# Altium PCB RPS_ARMOR_light_PCB_2022_V1.0.PcbDoc
Units mil, origin at the board's own origin, x right, y up, seen from the top; angles counter-clockwise.
Board outline 314.96 x 1771.65 mil, 3 copper layers (Top Layer, Mid-Layer 2, Bottom Layer); 13 components, 5 nets, 52 pads, 37 vias.
Unrouted connection lines stored in the file: 1.
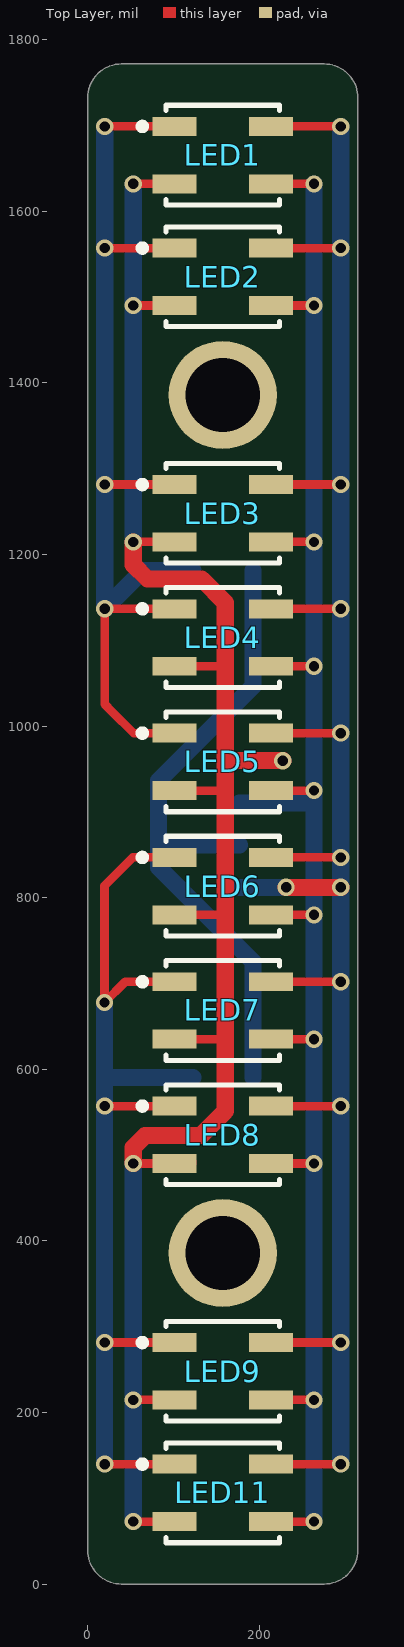
[diagram p0: Top Layer view]
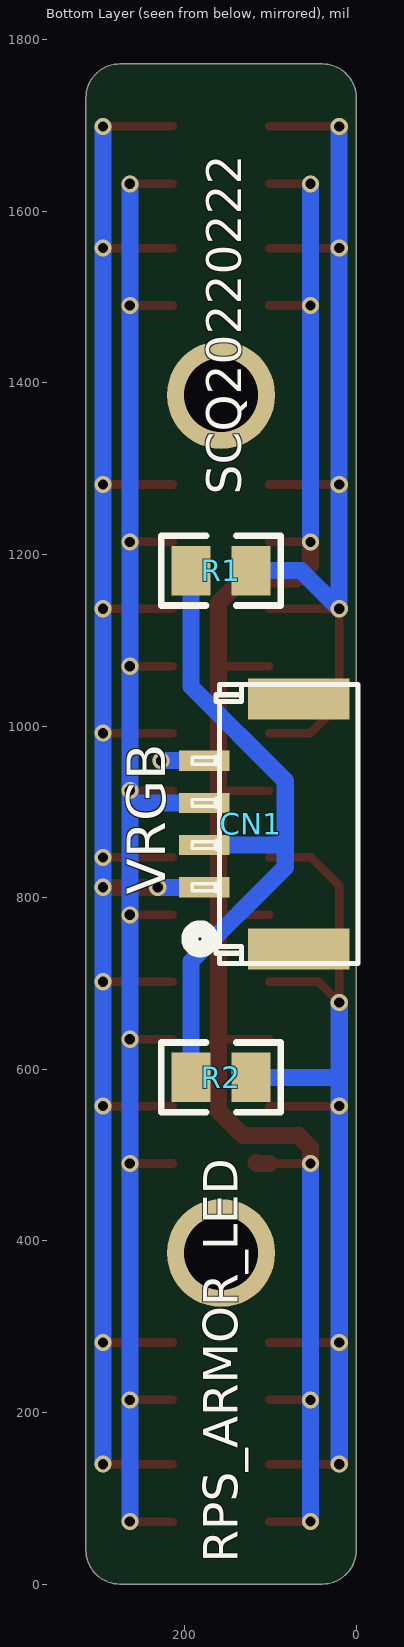
[diagram p1: Bottom Layer view, seen from below]
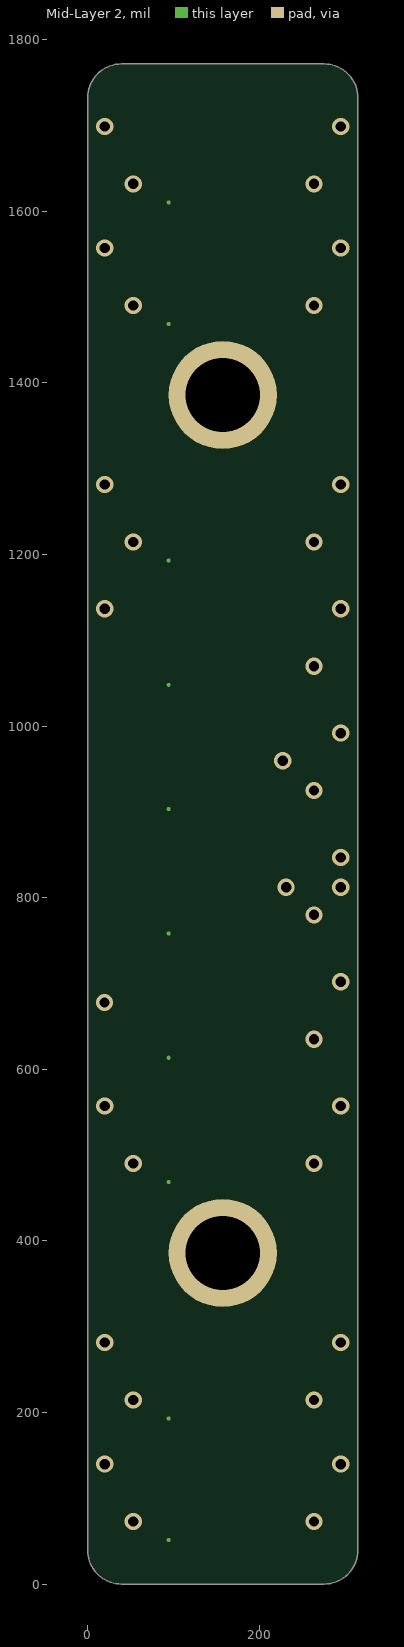
[diagram p2: Mid-Layer 2]
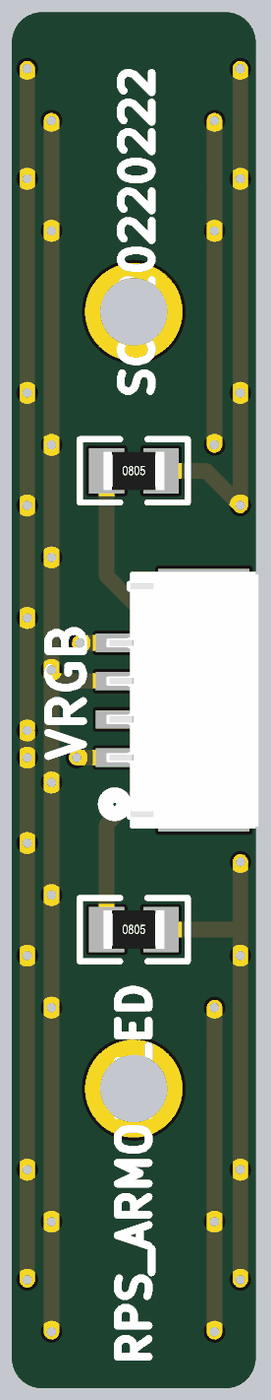
[diagram p3: 3D render of the assembled board from below, using the file's embedded part models]

## Layer stack, top to bottom
Top Solder: solder mask 0.4, Solder Resist, Dk 3.5
Top Layer: signal copper 1.4
Dielectric 1: dielectric 12.6, FR-4, Dk 4.8
Mid-Layer 2: signal copper 1.4
Dielectric2: dielectric 12.6, FR-4, Dk 4.8
Bottom Layer: signal copper 1.4
Bottom Solder: solder mask 0.4, Solder Resist, Dk 3.5

## Board outline
0,39.37 0,1732.28 cw(c39.37,1732.28) 39.37,1771.65 275.59,1771.65 cw(c275.59,1732.28) 314.96,1732.28 314.96,39.37 cw(c275.59,39.37) 275.59,0 39.37,0 cw(c39.37,39.37)

## Design rules (kind name [scope] priority, off if disabled: settings)
Clearance [All] p1: gap=10 ignorepadtopadclearanceinfootprint=FALSE except(0: Arc-Hole Track-Hole SMDPad-Hole THPad-Hole Via-Hole Fill-Hole Poly-Hole Region-Hole Text-Hole)
PolygonConnect [All] p1: connectstyle=Direct reliefconductorwidth=10 reliefentries=4 polygonreliefangle="90 Angle" airgapwidth=10
RoutingVias [All] p1: holewidth=28 width=50 viastyle="Through Hole" minholewidth=28 minwidth=50 maxholewidth=28 maxwidth=50
SolderMaskExpansion [All] p1: expansion=4
Width [All] p1: maxlimit=70 minlimit=10 preferedwidth=10 midlayer2_maxwidth=10 minimp=50.000000 maximp=50.000000 favimp=50.000000
30 further rules are at their usual default settings.

## Components (designator, comment, footprint, x,y, rotation, side; value= is the part's Value field where it differs from the comment)
CN1 "4P" GH1.25-WS-4P 78.74,885.83 r270 bottom
LED1 "HL-AF-3528S39FU70GH203BC-A-S1-HL" LED-SMD_4P-L3.2-W2.8-P1.70-TL 157.48,1665.35 r0 top
LED2 "HL-AF-3528S39FU70GH203BC-A-S1-HL" LED-SMD_4P-L3.2-W2.8-P1.70-TL 157.48,1523.62 r0 top
LED3 "HL-AF-3528S39FU70GH203BC-A-S1-HL" LED-SMD_4P-L3.2-W2.8-P1.70-TL 157.48,1248.03 r0 top
LED4 "HL-AF-3528S39FU70GH203BC-A-S1-HL" LED-SMD_4P-L3.2-W2.8-P1.70-TL 157.48,1103.15 r0 top
LED5 "HL-AF-3528S39FU70GH203BC-A-S1-HL" LED-SMD_4P-L3.2-W2.8-P1.70-TL 157.48,958.27 r0 top
LED6 "HL-AF-3528S39FU70GH203BC-A-S1-HL" LED-SMD_4P-L3.2-W2.8-P1.70-TL 157.48,813.39 r0 top
LED7 "HL-AF-3528S39FU70GH203BC-A-S1-HL" LED-SMD_4P-L3.2-W2.8-P1.70-TL 157.48,668.5 r0 top
LED8 "HL-AF-3528S39FU70GH203BC-A-S1-HL" LED-SMD_4P-L3.2-W2.8-P1.70-TL 157.48,523.62 r0 top
LED9 "HL-AF-3528S39FU70GH203BC-A-S1-HL" LED-SMD_4P-L3.2-W2.8-P1.70-TL 157.48,248.03 r0 top
LED11 "HL-AF-3528S39FU70GH203BC-A-S1-HL" LED-SMD_4P-L3.2-W2.8-P1.70-TL 157.48,106.3 r0 top
R1 "40Ω" LC-0805_R 157.48,1181.1 r180 bottom
R2 "40Ω" LC-0805_R 157.48,590.55 r180 bottom

## Footprints (in the part's own frame and the unit in brackets; to place one, negate y for a bottom-side part, rotate by r counter-clockwise, add the part's x,y. Pads: shape width x height; smd on the part's side, far side on the other; paste and mask are expansions set on the pad)
GH1.25-WS-4P [mm] "A1257WR-S-4P"
  rect 1.2x3 smd: 0(-3.7,0.3) 0(3.7,0.3)
  rect 0.6x1.5 smd: 1(1.875,-2.5) 2(0.625,-2.5) 3(-0.625,-2.5) 4(-1.875,-2.5)
  silkscreen extent -4.13,-2.93 4.12,2.05, body extent -4.12,-2.8 4.13,2.1, height 4.4
LC-0805_R [mm]
  rect 1.16x1.47 smd: 1(-0.89,0) 2(0.89,0)
  silkscreen extent -1.77,-1.04 1.77,1.03, body extent -1,-0.63 1,0.63, height 0.49
LED-SMD_4P-L3.2-W2.8-P1.70-TL [mm]
  rect 1.305x0.56 smd: 1(-1.428,0.85) 2(1.428,0.85) 3(1.428,-0.85) 4(-1.428,-0.85)
  Mid-Layer 2 circle w0.06: c-1.6,-1.4 r0.03
  silkscreen extent -2.48,-1.48 1.68,1.48

## Part data
CN1: BOM_JLCPCB Part Class="Extended Part", BOM_Manufacturer="Changjiang Connectors", BOM_Manufacturer Part=A1257WR-S-4P, BOM_Supplier=LCSC, BOM_Supplier Part=C225127, Contributor=LCSC, spicePre=C, spiceSymbolName=A1257WR-S-4P
LED1 LED2 LED3 LED4 LED5 LED6 LED7 LED8 LED9 LED11: BOM_Manufacturer="HONGLITRONIC(Hongli Zhihui (HONGLITRONIC))", BOM_Manufacturer Part=HL-AF-3528S39FU70GH203BC-A-S1-HL, BOM_Supplier=LCSC, BOM_Supplier Part=C516144, Contributor=LCSC, spicePre=L, spiceSymbolName=HL-AF-3528S39FU70GH203BC-A-S1-HL
R1 R2: library part "0603 100KΩ (1003) 1%", "贴片电阻", Package=0603, SuppliersPartNumber=C25803, ComponentLink1Description=供应商, ComponentLink1URL=http://www.szlcsc.com/product/details_26546.html, Supplier=LC

## Free pads (board coordinates)
  round 125.98 hole 86.61: 13(157.48,385.83) 13(157.48,1385.83)

## Via types
v1: diameter 20.08, hole 12, Top Layer to Bottom Layer, 37 vias

## Nets (pads, with @x,y where several pads share a name; then routed paths per layer and width w, separated by ;. In a path a pad name is that pad's centre, name@x,y a point inside that pad or via, vN(x,y) a via of type N, cw(c..) or ccw(c..) an arc to the next point about the centre after c; other vN are vias at no path point)
3V: CN1.1 LED1.2 LED2.2 LED3.2 LED4.2 LED5.2 LED6.2 LED7.2 LED8.2 LED9.2 LED11.2 | length 2490.9
  Top Layer w10: LED11.2 v1(295.08,139.76) ; LED9.2 v1(295.08,281.5) ; LED8.2 v1(295.08,557.09) ; LED7.2 v1(295.08,701.97) ; LED6.2 v1(295.08,846.85) ; LED5.2 v1(295.08,991.73) ; LED4.2 v1(295.08,1136.61) ; LED3.2 v1(295.08,1281.5) ; LED2.2 v1(295.08,1557.09) ; LED1.2 v1(295.08,1698.82)
  Top Layer w20: v1(231.3,812.01) v1(295.08,812.01)
  Bottom Layer w20: CN1.1 v1(231.3,812.01) ; v1(295.08,139.76) v1(295.08,281.5) v1(295.08,557.09) v1(295.08,701.97) v1(295.08,846.85) v1(295.08,991.73) v1(295.08,1136.61) v1(295.08,1281.5) v1(295.08,1557.09) v1(295.08,1698.82)
B_GND: CN1.4 LED1.4 LED2.4 LED3.4 LED4.4 LED5.4 LED6.4 LED7.4 LED8.4 LED9.4 LED11.4 | length 2385.6
  Top Layer w10: v1(53.15,72.83) LED11.4 ; v1(53.15,214.57) LED9.4 ; v1(53.15,490.16) LED8.4 ; v1(53.15,1214.57) LED3.4 ; v1(53.15,1490.16) LED2.4 ; v1(53.15,1631.89) LED1.4 ; LED7.4 158.66,635.04 160.43,636.81 ; LED6.4 159.84,779.92 160.43,780.51 ; LED5.4 159.05,924.8 160.43,926.18 ; LED4.4 156.3,1069.68 160.43,1073.82
  Top Layer w20: v1(53.15,490.16) 53.15,508.86 66.93,522.64 131.92,522.64 160.43,551.15 160.43,636.81 160.43,780.51 160.43,813.98 160.43,926.18 160.43,957.68 ; v1(53.15,1214.57) 53.16,1187.98 69.88,1171.26 132.87,1171.26 160.43,1143.7 160.43,1073.82 160.43,957.68 ; LED8.4 115.94,490.16 LED8.4@116.97,491.18 ; v1(227.36,959.65) 162.4,959.65 160.43,957.68
  Bottom Layer w20: v1(53.15,72.83) v1(53.15,214.57) v1(53.15,490.16) ; v1(53.15,1214.57) v1(53.15,1490.16) v1(53.15,1631.89) ; CN1.4 v1(227.36,959.65)
G_GND: CN1.3 LED1.3 LED2.3 LED3.3 LED4.3 LED5.3 LED6.3 LED7.3 LED8.3 LED9.3 LED11.3 | length 2147.1
  Top Layer w10: LED11.3 v1(263.78,72.83) ; LED9.3 v1(263.78,214.57) ; LED8.3 v1(263.78,490.16) ; LED7.3 v1(263.78,635.04) ; LED6.3 v1(263.78,779.92) ; LED5.3 v1(263.78,924.8) ; LED4.3 v1(263.78,1069.68) ; LED3.3 v1(263.78,1214.57) ; LED2.3 v1(263.78,1490.16) ; LED1.3 v1(263.78,1631.89)
  Bottom Layer w20: CN1.3 262.8,910.43 263.78,909.45 ; v1(263.78,72.83) v1(263.78,214.57) v1(263.78,490.16) v1(263.78,635.04) v1(263.78,779.92) 263.78,909.45 ; v1(263.78,1631.89) v1(263.78,1490.16) v1(263.78,1214.57) v1(263.78,1069.68) v1(263.78,924.8) 263.78,909.45
NetCN1_2: CN1.2 R1.1 R2.1 | length 777.3
  Bottom Layer w20: CN1.2 85.63,861.22 82.68,858.27 ; R2.1 192.52,725.53 82.68,835.37 82.68,858.27 ; R1.1 192.52,1046.13 82.68,936.28 82.68,908.46 82.68,858.27
R_GND: LED1.1 LED2.1 LED3.1 LED4.1 LED5.1 LED6.1 LED7.1 LED8.1 LED9.1 LED11.1 R1.2 R2.2 | length 2423.7
  Top Layer w10: v1(19.88,139.76) LED11.1 ; v1(19.88,281.5) LED9.1 ; v1(19.88,557.09) LED8.1 ; v1(19.88,1281.5) LED3.1 ; v1(19.88,1557.09) LED2.1 ; v1(19.88,1698.82) LED1.1 ; LED7.1 43.9,701.97 v1(19.68,677.76) 19.68,813.98 29.53,823.82 52.56,846.85 LED6.1 ; LED5.1 53.54,991.73 28.54,1016.73 19.88,1025.39 v1(19.88,1136.61) LED4.1
  Bottom Layer w10: v1(19.68,677.76) v1@19.78,677.66 ; v1@19.78,139.86 v1(19.88,139.76)
  Bottom Layer w20: v1@19.78,139.86 19.78,589.57 ; v1@19.78,677.66 19.78,589.57 ; v1(19.88,1698.82) v1(19.88,1557.09) v1(19.88,1281.5) v1(19.88,1136.61) 64.37,1181.1 R1.2 ; R2.2 20.77,590.55 19.78,589.57
pads on no net: CN1.0

## Silkscreen, mask and mechanical layers (free items; w line width, h text height)
Bottom Overlay:
  text "SCQ20220222" at 133.86,1269.68 h40 r270
  text "VRGB" at 222.44,803.15 h45 r270
  text "RPS_ARMOR_LED" at 137.8,24.61 h40 r270
Mechanical 1:
  the board outline again, w11.81